# EAGLE board 13346-Serial Controlled Motor Driver-panel_v20 (EAGLE 7.5.0), part 1 of 11
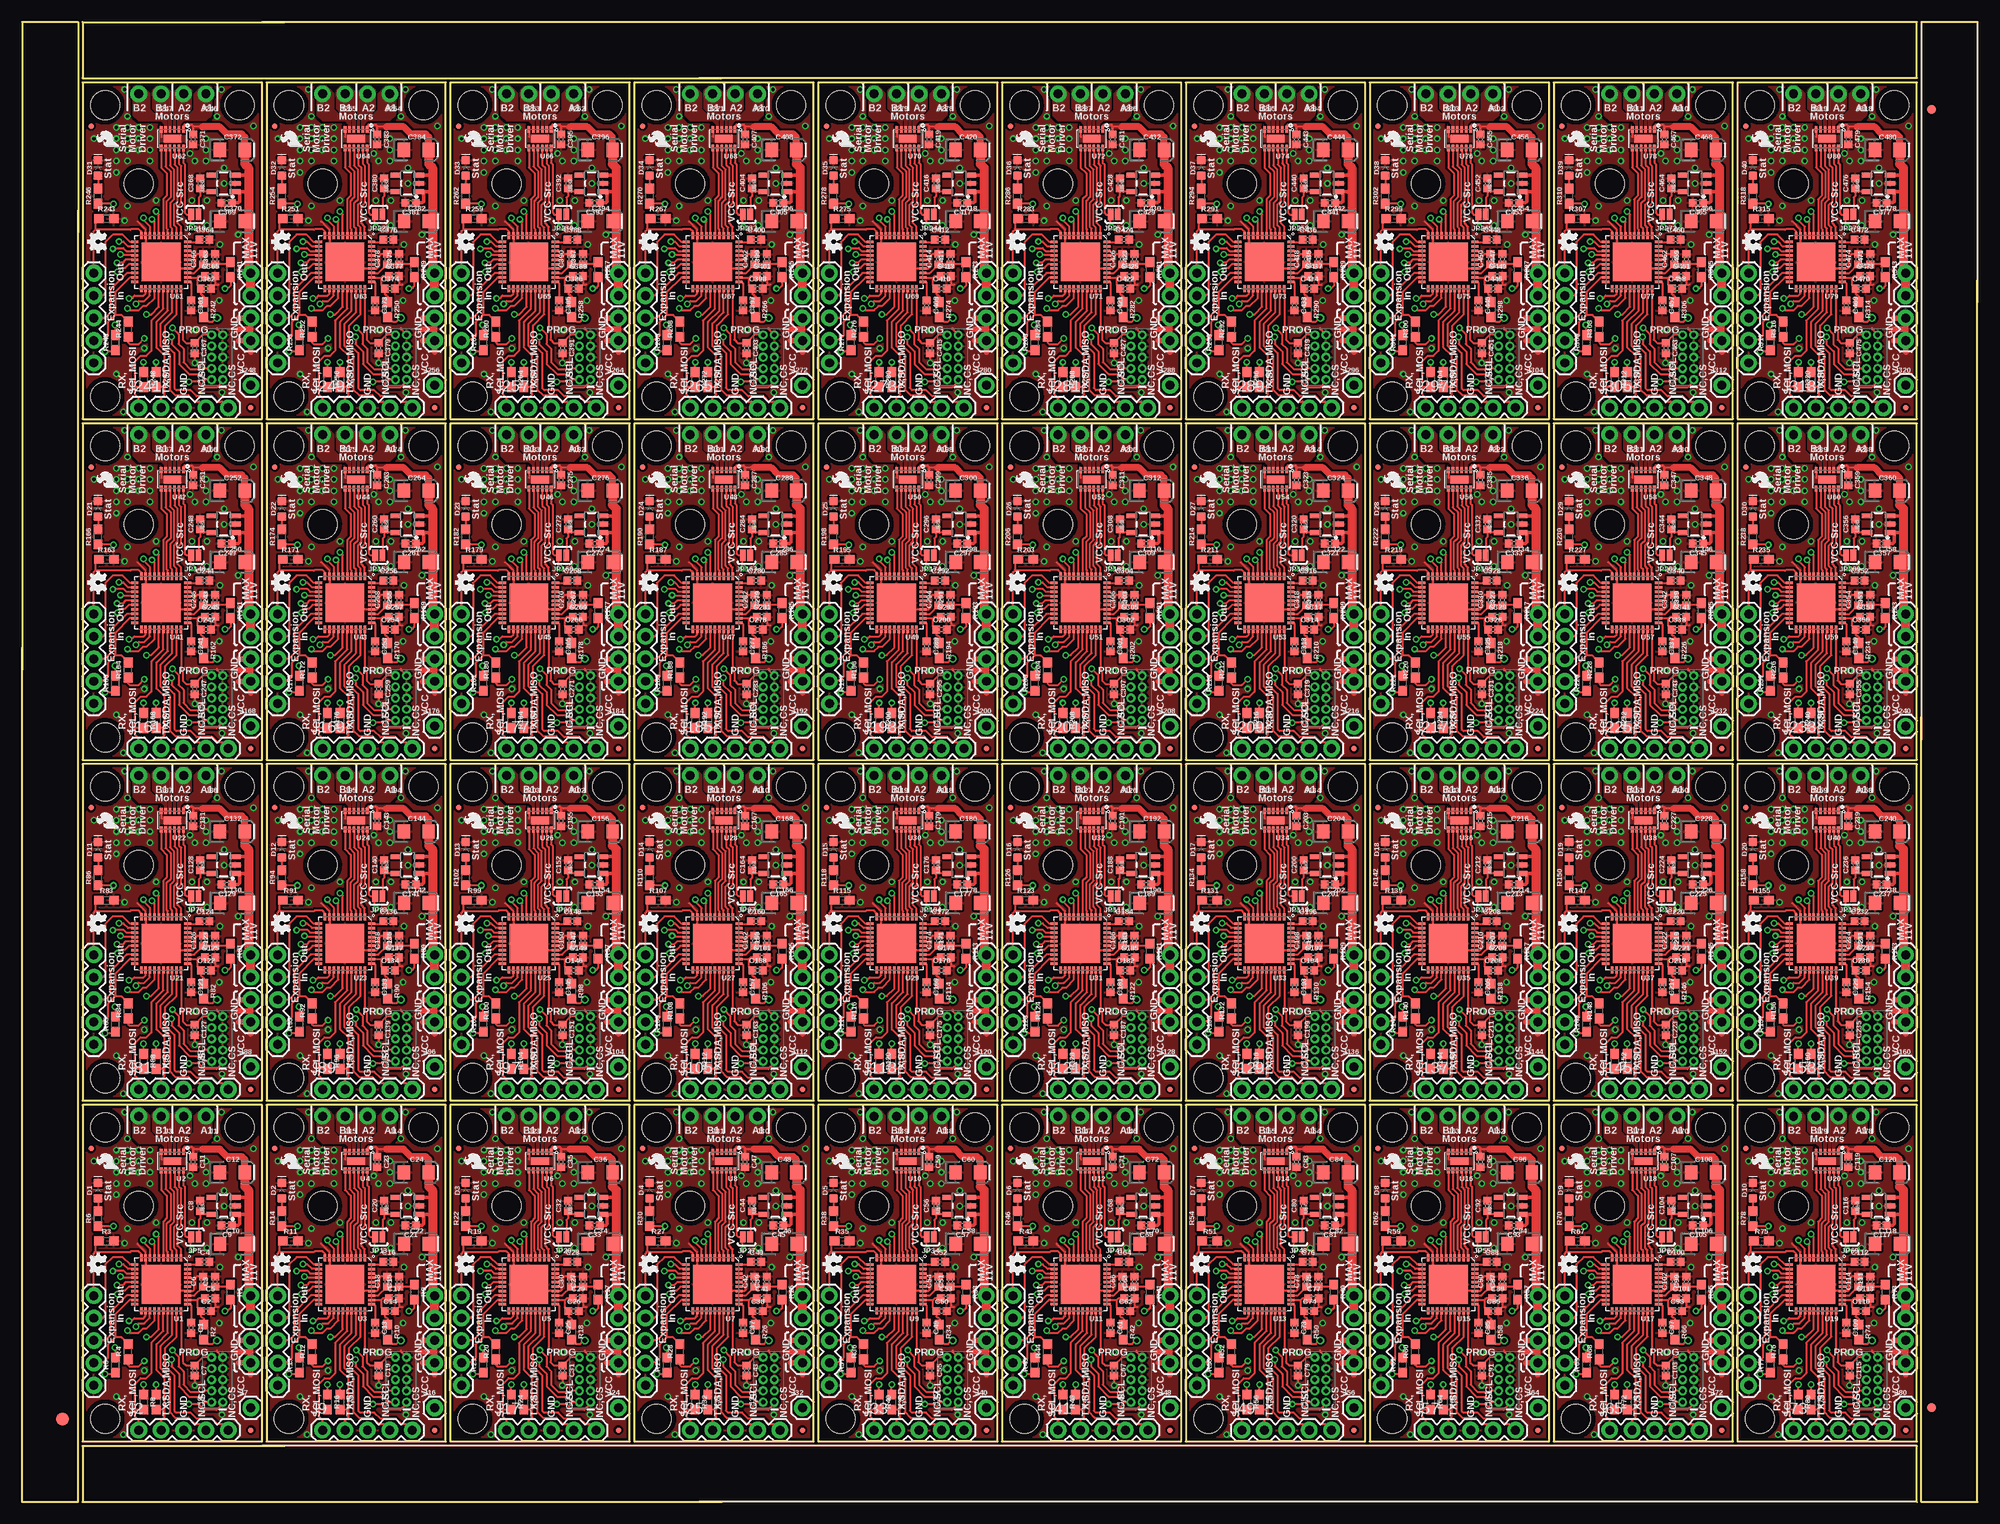
[diagram p0: board, top side]
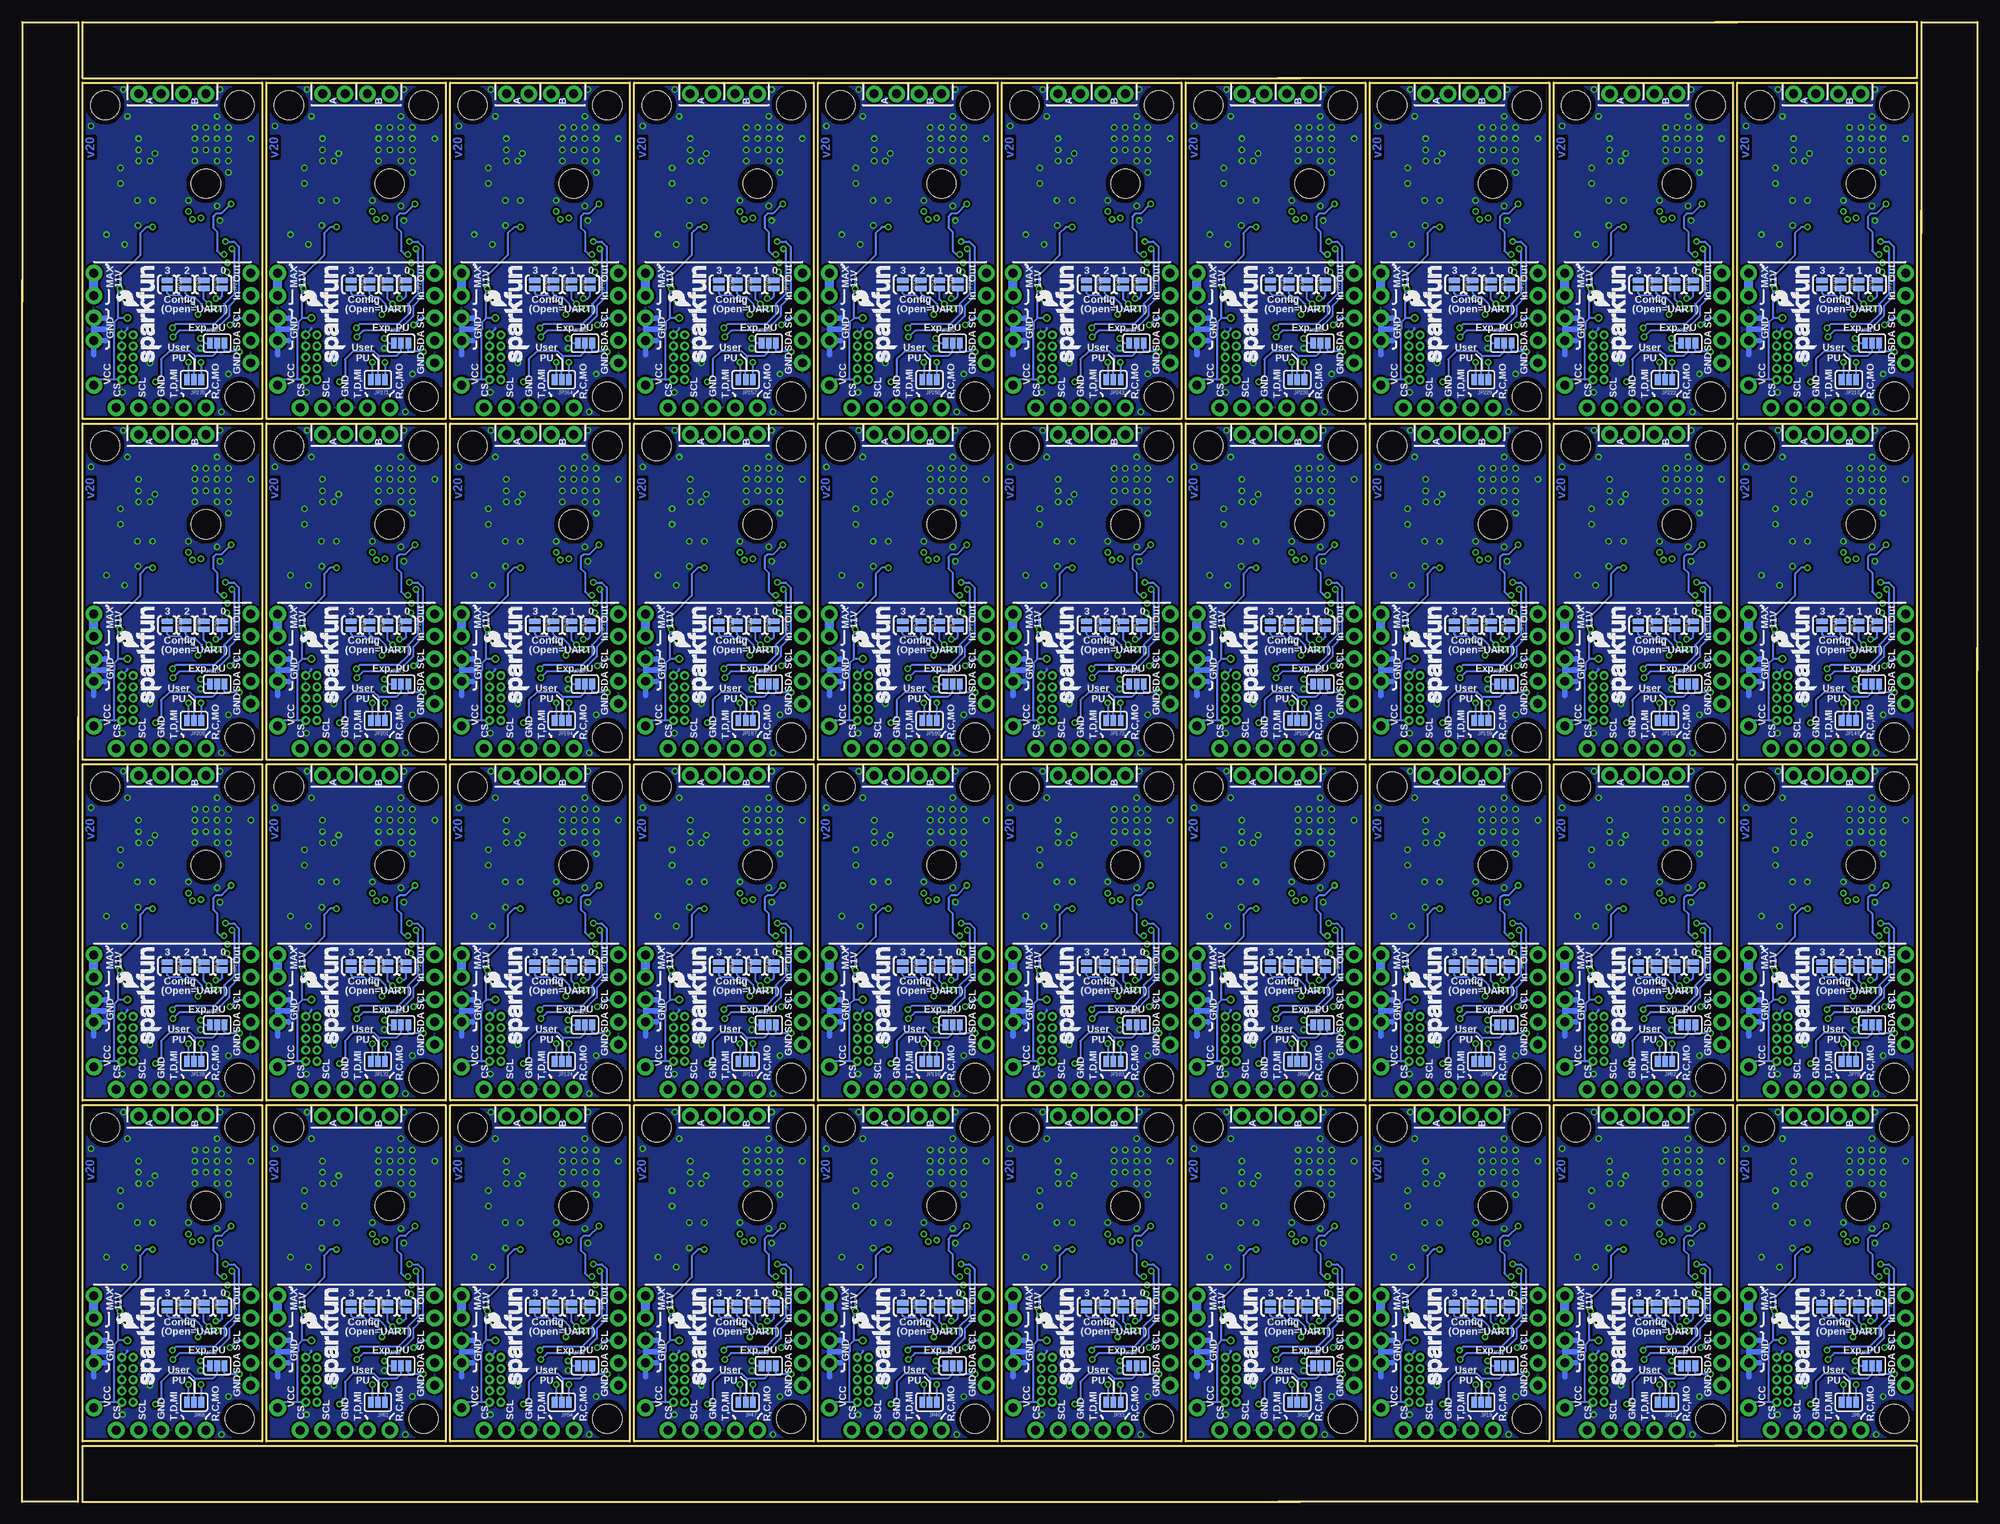
[diagram p1: board, bottom side, seen from below]

Size 221.49 x 167.64 mm. Coordinates in mm from the lower left corner, seen from the top.
Outline: 184 segments
Copper layers (1*16): Top 0.035mm / dielectric 1.5mm / Bottom 0.035mm
Design rules "SparkFun-2-layer-TIGHT": minimum track width 7mil, minimum drill 15mil, track to track 7mil, track to pad 7mil, pad to pad 7mil, via to via 7mil, smd to smd 7mil, copper to edge 7mil, drill to drill 7mil, minimum pad ring 7mil, minimum via ring 7mil, stop-mask expansion 4mil, vias tented up to drill 25mil, thermal gap 10mil

## Footprints (pad centres in the part's own frame; a part is rotated, then mirrored left to right if it is on the bottom)
0402 = smd 0.85 x 0.9: 1 -0.58,0; 2 0.58,0
EIA3216 = smd 1.4 x 1.6: + 1.4,0; - -1.4,0
LED-0603 = smd 1 x 1: A -0.877,0; C 0.877,0
FIDUCIAL-1.5X3 = smd 1.5 x 1.5: 1 0,0
FIDUCIAL-1X2 = smd 1 x 1: 1 0,0
MICRO-FIDUCIAL = smd 0.635 x 0.635: 1 0,0
STAND-OFF = hole 3.302: 0,0
1X02_NO_SILK = drill 1.016 pad 1.88: 1 0,0; 2 2.54,0
1X05 = drill 1.016 pad 1.88: 1 0,0; 2 2.54,0; 3 5.08,0; 4 7.62,0; 5 10.16,0
1X02@1 = drill 1.016 pad 1.88: 1 0,0; 2 2.54,0
1X01 = drill 1.016 pad 1.88: 1 0,0
2X5-PTH-1.27MM = drill 0.508 pad 1: 1 -2.54,-0.635; 2 -2.54,0.635; 3 -1.27,-0.635; 4 -1.27,0.635; 5 0,-0.635; 6 0,0.635; 7 1.27,-0.635; 8 1.27,0.635; 9 2.54,-0.635; 10 2.54,0.635
PAD-JUMPER-2-NO_YES_SILK = smd 0.635 x 1.27: 1 -0.45,0; 2 0.45,0
PAD-JUMPER-2-NC_BY_PASTE_YES_SILK = smd 0.635 x 1.27: 1 -0.401,0; 2 0.413,0
PAD-JUMPER-3-NO_YES_SILK = smd 0.635 x 1.27: 1 -0.813,0; 2 0,0; 3 0.813,0
0603 = smd 1.1 x 1: 1 -0.85,0; 2 0.85,0
QFN-40 = smd 0.285 x 0.8: 1 -2.25,-3; 2 -1.75,-3; 3 -1.25,-3; 4 -0.75,-3; 5 -0.25,-3; 6 0.25,-3; 7 0.75,-3; 8 1.25,-3; 9 1.75,-3; 10 2.25,-3; 21 2.25,3; 22 1.75,3; 23 1.25,3; 24 0.75,3; 25 0.25,3; 26 -0.25,3; 27 -0.75,3; 28 -1.25,3; 29 -1.75,3; 30 -2.25,3 | smd 0.8 x 0.285: 11 3,-2.25; 12 3,-1.75; 13 3,-1.25; 14 3,-0.75; 15 3,-0.25; 16 3,0.25; 17 3,0.75; 18 3,1.25; 19 3,1.75; 20 3,2.25; 31 -3,2.25; 32 -3,1.75; 33 -3,1.25; 34 -3,0.75; 35 -3,0.25; 36 -3,-0.25; 37 -3,-0.75; 38 -3,-1.25; 39 -3,-1.75; 40 -3,-2.25 | smd 4.4 x 4.4: EP 0,0
WSON-12 = smd 0.3 x 0.7: 1 -1.25,-1.05; 2 -0.75,-1.05; 3 -0.25,-1.05; 4 0.25,-1.05; 5 0.75,-1.05; 6 1.25,-1.05; 7 1.25,1.05; 8 0.75,1.05; 9 0.25,1.05; 10 -0.25,1.05; 11 -0.75,1.05; 12 -1.25,1.05 | smd 2 x 0.9: PAD 0,0
SOT-23-5-VREG = smd 0.55 x 1.2: 1 -0.95,-1.3; 2 0,-1.3; 3 0.95,-1.3; 4 0.95,1.3; 5 -0.95,1.3

## Placement (x,y rotation side)
C1  1.0uF  [0402]  19.16,19.72 270 top
C2  1.0uF  [0402]  20.83,21.62 0 top
C3  1.0uF  [0402]  21.88,24.96 90 top
C4  1.0uF  [0402]  20.67,27.18 0 top
C5  0.1uF  [0402]  21.3,23.05 0 top
C6  0.1uF  [0402]  20.51,24.96 90 top
C7  0.1uF  [0402]  19.56,14.87 270 top
C8  1.0uF  [0402]  20.2,33.53 90 top
C9  1.0uF  [0402]  23.19,31.33 180 top
C10  10uF  [EIA3216]  23.84,29.24 0 top
C11  0.1uF  [0402]  19.4,38.53 270 top
C12  10uF  [EIA3216]  23.83,37.33 0 top
C13  1.0uF  [0402]  39.99,19.72 270 top
C14  1.0uF  [0402]  41.66,21.62 0 top
C15  1.0uF  [0402]  42.7,24.96 90 top
C16  1.0uF  [0402]  41.5,27.18 0 top
C17  0.1uF  [0402]  42.13,23.05 0 top
C18  0.1uF  [0402]  41.34,24.96 90 top
C19  0.1uF  [0402]  40.39,14.87 270 top
C20  1.0uF  [0402]  41.03,33.53 90 top
C21  1.0uF  [0402]  44.01,31.33 180 top
C22  10uF  [EIA3216]  44.67,29.24 0 top
C23  0.1uF  [0402]  40.23,38.53 270 top
C24  10uF  [EIA3216]  44.66,37.33 0 top
C25  1.0uF  [0402]  60.82,19.72 270 top
C26  1.0uF  [0402]  62.48,21.62 0 top
C27  1.0uF  [0402]  63.53,24.96 90 top
C28  1.0uF  [0402]  62.33,27.18 0 top
C29  0.1uF  [0402]  62.96,23.05 0 top
C30  0.1uF  [0402]  62.17,24.96 90 top
C31  0.1uF  [0402]  61.21,14.87 270 top
C32  1.0uF  [0402]  61.86,33.53 90 top
C33  1.0uF  [0402]  64.84,31.33 180 top
C34  10uF  [EIA3216]  65.5,29.24 0 top
C35  0.1uF  [0402]  61.06,38.53 270 top
C36  10uF  [EIA3216]  65.48,37.33 0 top
C37  1.0uF  [0402]  81.65,19.72 270 top
C38  1.0uF  [0402]  83.31,21.62 0 top
C39  1.0uF  [0402]  84.36,24.96 90 top
C40  1.0uF  [0402]  83.15,27.18 0 top
C41  0.1uF  [0402]  83.79,23.05 0 top
C42  0.1uF  [0402]  82.99,24.96 90 top
C43  0.1uF  [0402]  82.04,14.87 270 top
C44  1.0uF  [0402]  82.68,33.53 90 top
C45  1.0uF  [0402]  85.67,31.33 180 top
C46  10uF  [EIA3216]  86.33,29.24 0 top
C47  0.1uF  [0402]  81.88,38.53 270 top
C48  10uF  [EIA3216]  86.31,37.33 0 top
C49  1.0uF  [0402]  102.47,19.72 270 top
C50  1.0uF  [0402]  104.14,21.62 0 top
C51  1.0uF  [0402]  105.19,24.96 90 top
C52  1.0uF  [0402]  103.98,27.18 0 top
C53  0.1uF  [0402]  104.62,23.05 0 top
C54  0.1uF  [0402]  103.82,24.96 90 top
C55  0.1uF  [0402]  102.87,14.87 270 top
C56  1.0uF  [0402]  103.51,33.53 90 top
C57  1.0uF  [0402]  106.5,31.33 180 top
C58  10uF  [EIA3216]  107.16,29.24 0 top
C59  0.1uF  [0402]  102.71,38.53 270 top
C60  10uF  [EIA3216]  107.14,37.33 0 top
C61  1.0uF  [0402]  123.3,19.72 270 top
C62  1.0uF  [0402]  124.97,21.62 0 top
C63  1.0uF  [0402]  126.02,24.96 90 top
C64  1.0uF  [0402]  124.81,27.18 0 top
C65  0.1uF  [0402]  125.44,23.05 0 top
C66  0.1uF  [0402]  124.65,24.96 90 top
C67  0.1uF  [0402]  123.7,14.87 270 top
C68  1.0uF  [0402]  124.34,33.53 90 top
C69  1.0uF  [0402]  127.33,31.33 180 top
C70  10uF  [EIA3216]  127.98,29.24 0 top
C71  0.1uF  [0402]  123.54,38.53 270 top
C72  10uF  [EIA3216]  127.97,37.33 0 top
C73  1.0uF  [0402]  144.13,19.72 270 top
C74  1.0uF  [0402]  145.8,21.62 0 top
C75  1.0uF  [0402]  146.84,24.96 90 top
C76  1.0uF  [0402]  145.64,27.18 0 top
C77  0.1uF  [0402]  146.27,23.05 0 top
C78  0.1uF  [0402]  145.48,24.96 90 top
C79  0.1uF  [0402]  144.53,14.87 270 top
C80  1.0uF  [0402]  145.17,33.53 90 top
C81  1.0uF  [0402]  148.15,31.33 180 top
C82  10uF  [EIA3216]  148.81,29.24 0 top
C83  0.1uF  [0402]  144.37,38.53 270 top
C84  10uF  [EIA3216]  148.8,37.33 0 top
C85  1.0uF  [0402]  164.96,19.72 270 top
C86  1.0uF  [0402]  166.62,21.62 0 top
C87  1.0uF  [0402]  167.67,24.96 90 top
C88  1.0uF  [0402]  166.47,27.18 0 top
C89  0.1uF  [0402]  167.1,23.05 0 top
C90  0.1uF  [0402]  166.31,24.96 90 top
C91  0.1uF  [0402]  165.35,14.87 270 top
C92  1.0uF  [0402]  166,33.53 90 top
C93  1.0uF  [0402]  168.98,31.33 180 top
C94  10uF  [EIA3216]  169.64,29.24 0 top
C95  0.1uF  [0402]  165.2,38.53 270 top
C96  10uF  [EIA3216]  169.62,37.33 0 top
C97  1.0uF  [0402]  185.79,19.72 270 top
C98  1.0uF  [0402]  187.45,21.62 0 top
C99  1.0uF  [0402]  188.5,24.96 90 top
C100  1.0uF  [0402]  187.29,27.18 0 top
C101  0.1uF  [0402]  187.93,23.05 0 top
C102  0.1uF  [0402]  187.13,24.96 90 top
C103  0.1uF  [0402]  186.18,14.87 270 top
C104  1.0uF  [0402]  186.82,33.53 90 top
C105  1.0uF  [0402]  189.81,31.33 180 top
C106  10uF  [EIA3216]  190.47,29.24 0 top
C107  0.1uF  [0402]  186.02,38.53 270 top
C108  10uF  [EIA3216]  190.45,37.33 0 top
C109  1.0uF  [0402]  206.61,19.72 270 top
C110  1.0uF  [0402]  208.28,21.62 0 top
C111  1.0uF  [0402]  209.33,24.96 90 top
C112  1.0uF  [0402]  208.12,27.18 0 top
C113  0.1uF  [0402]  208.76,23.05 0 top
C114  0.1uF  [0402]  207.96,24.96 90 top
C115  0.1uF  [0402]  207.01,14.87 270 top
C116  1.0uF  [0402]  207.65,33.53 90 top
C117  1.0uF  [0402]  210.64,31.33 180 top
C118  10uF  [EIA3216]  211.3,29.24 0 top
C119  0.1uF  [0402]  206.85,38.53 270 top
C120  10uF  [EIA3216]  211.28,37.33 0 top
C121  1.0uF  [0402]  19.16,58.32 270 top
C122  1.0uF  [0402]  20.83,60.23 0 top
C123  1.0uF  [0402]  21.88,63.56 90 top
C124  1.0uF  [0402]  20.67,65.79 0 top
C125  0.1uF  [0402]  21.3,61.66 0 top
C126  0.1uF  [0402]  20.51,63.56 90 top
C127  0.1uF  [0402]  19.56,53.48 270 top
C128  1.0uF  [0402]  20.2,72.14 90 top
C129  1.0uF  [0402]  23.19,69.94 180 top
C130  10uF  [EIA3216]  23.84,67.85 0 top
C131  0.1uF  [0402]  19.4,77.14 270 top
C132  10uF  [EIA3216]  23.83,75.94 0 top
C133  1.0uF  [0402]  39.99,58.32 270 top
C134  1.0uF  [0402]  41.66,60.23 0 top
C135  1.0uF  [0402]  42.7,63.56 90 top
C136  1.0uF  [0402]  41.5,65.79 0 top
C137  0.1uF  [0402]  42.13,61.66 0 top
C138  0.1uF  [0402]  41.34,63.56 90 top
C139  0.1uF  [0402]  40.39,53.48 270 top
C140  1.0uF  [0402]  41.03,72.14 90 top
C141  1.0uF  [0402]  44.01,69.94 180 top
C142  10uF  [EIA3216]  44.67,67.85 0 top
C143  0.1uF  [0402]  40.23,77.14 270 top
C144  10uF  [EIA3216]  44.66,75.94 0 top
C145  1.0uF  [0402]  60.82,58.32 270 top
C146  1.0uF  [0402]  62.48,60.23 0 top
C147  1.0uF  [0402]  63.53,63.56 90 top
C148  1.0uF  [0402]  62.33,65.79 0 top
C149  0.1uF  [0402]  62.96,61.66 0 top
C150  0.1uF  [0402]  62.17,63.56 90 top
C151  0.1uF  [0402]  61.21,53.48 270 top
C152  1.0uF  [0402]  61.86,72.14 90 top
C153  1.0uF  [0402]  64.84,69.94 180 top
C154  10uF  [EIA3216]  65.5,67.85 0 top
C155  0.1uF  [0402]  61.06,77.14 270 top
C156  10uF  [EIA3216]  65.48,75.94 0 top
C157  1.0uF  [0402]  81.65,58.32 270 top
C158  1.0uF  [0402]  83.31,60.23 0 top
C159  1.0uF  [0402]  84.36,63.56 90 top
C160  1.0uF  [0402]  83.15,65.79 0 top
C161  0.1uF  [0402]  83.79,61.66 0 top
C162  0.1uF  [0402]  82.99,63.56 90 top
C163  0.1uF  [0402]  82.04,53.48 270 top
C164  1.0uF  [0402]  82.68,72.14 90 top
C165  1.0uF  [0402]  85.67,69.94 180 top
C166  10uF  [EIA3216]  86.33,67.85 0 top
C167  0.1uF  [0402]  81.88,77.14 270 top
C168  10uF  [EIA3216]  86.31,75.94 0 top
C169  1.0uF  [0402]  102.47,58.32 270 top
C170  1.0uF  [0402]  104.14,60.23 0 top
C171  1.0uF  [0402]  105.19,63.56 90 top
C172  1.0uF  [0402]  103.98,65.79 0 top
C173  0.1uF  [0402]  104.62,61.66 0 top
C174  0.1uF  [0402]  103.82,63.56 90 top
C175  0.1uF  [0402]  102.87,53.48 270 top
C176  1.0uF  [0402]  103.51,72.14 90 top
C177  1.0uF  [0402]  106.5,69.94 180 top
C178  10uF  [EIA3216]  107.16,67.85 0 top
C179  0.1uF  [0402]  102.71,77.14 270 top
C180  10uF  [EIA3216]  107.14,75.94 0 top
C181  1.0uF  [0402]  123.3,58.32 270 top
C182  1.0uF  [0402]  124.97,60.23 0 top
C183  1.0uF  [0402]  126.02,63.56 90 top
C184  1.0uF  [0402]  124.81,65.79 0 top
C185  0.1uF  [0402]  125.44,61.66 0 top
C186  0.1uF  [0402]  124.65,63.56 90 top
C187  0.1uF  [0402]  123.7,53.48 270 top
C188  1.0uF  [0402]  124.34,72.14 90 top
C189  1.0uF  [0402]  127.33,69.94 180 top
C190  10uF  [EIA3216]  127.98,67.85 0 top
C191  0.1uF  [0402]  123.54,77.14 270 top
C192  10uF  [EIA3216]  127.97,75.94 0 top
C193  1.0uF  [0402]  144.13,58.32 270 top
C194  1.0uF  [0402]  145.8,60.23 0 top
C195  1.0uF  [0402]  146.84,63.56 90 top
C196  1.0uF  [0402]  145.64,65.79 0 top
C197  0.1uF  [0402]  146.27,61.66 0 top
C198  0.1uF  [0402]  145.48,63.56 90 top
C199  0.1uF  [0402]  144.53,53.48 270 top
C200  1.0uF  [0402]  145.17,72.14 90 top
C201  1.0uF  [0402]  148.15,69.94 180 top
C202  10uF  [EIA3216]  148.81,67.85 0 top
C203  0.1uF  [0402]  144.37,77.14 270 top
C204  10uF  [EIA3216]  148.8,75.94 0 top
C205  1.0uF  [0402]  164.96,58.32 270 top
C206  1.0uF  [0402]  166.62,60.23 0 top
C207  1.0uF  [0402]  167.67,63.56 90 top
C208  1.0uF  [0402]  166.47,65.79 0 top
C209  0.1uF  [0402]  167.1,61.66 0 top
C210  0.1uF  [0402]  166.31,63.56 90 top
C211  0.1uF  [0402]  165.35,53.48 270 top
C212  1.0uF  [0402]  166,72.14 90 top
C213  1.0uF  [0402]  168.98,69.94 180 top
C214  10uF  [EIA3216]  169.64,67.85 0 top
C215  0.1uF  [0402]  165.2,77.14 270 top
C216  10uF  [EIA3216]  169.62,75.94 0 top
C217  1.0uF  [0402]  185.79,58.32 270 top
C218  1.0uF  [0402]  187.45,60.23 0 top
C219  1.0uF  [0402]  188.5,63.56 90 top
C220  1.0uF  [0402]  187.29,65.79 0 top
C221  0.1uF  [0402]  187.93,61.66 0 top
C222  0.1uF  [0402]  187.13,63.56 90 top
C223  0.1uF  [0402]  186.18,53.48 270 top
C224  1.0uF  [0402]  186.82,72.14 90 top
C225  1.0uF  [0402]  189.81,69.94 180 top
C226  10uF  [EIA3216]  190.47,67.85 0 top
C227  0.1uF  [0402]  186.02,77.14 270 top
C228  10uF  [EIA3216]  190.45,75.94 0 top
C229  1.0uF  [0402]  206.61,58.32 270 top
C230  1.0uF  [0402]  208.28,60.23 0 top
C231  1.0uF  [0402]  209.33,63.56 90 top
C232  1.0uF  [0402]  208.12,65.79 0 top
C233  0.1uF  [0402]  208.76,61.66 0 top
C234  0.1uF  [0402]  207.96,63.56 90 top
C235  0.1uF  [0402]  207.01,53.48 270 top
C236  1.0uF  [0402]  207.65,72.14 90 top
C237  1.0uF  [0402]  210.64,69.94 180 top
C238  10uF  [EIA3216]  211.3,67.85 0 top
C239  0.1uF  [0402]  206.85,77.14 270 top
C240  10uF  [EIA3216]  211.28,75.94 0 top
C241  1.0uF  [0402]  19.16,96.93 270 top
C242  1.0uF  [0402]  20.83,98.84 0 top
C243  1.0uF  [0402]  21.88,102.17 90 top
C244  1.0uF  [0402]  20.67,104.39 0 top
C245  0.1uF  [0402]  21.3,100.27 0 top
C246  0.1uF  [0402]  20.51,102.17 90 top
C247  0.1uF  [0402]  19.56,92.09 270 top
C248  1.0uF  [0402]  20.2,110.74 90 top
C249  1.0uF  [0402]  23.19,108.55 180 top
C250  10uF  [EIA3216]  23.84,106.46 0 top
C251  0.1uF  [0402]  19.4,115.74 270 top
C252  10uF  [EIA3216]  23.83,114.55 0 top
C253  1.0uF  [0402]  39.99,96.93 270 top
C254  1.0uF  [0402]  41.66,98.84 0 top
C255  1.0uF  [0402]  42.7,102.17 90 top
C256  1.0uF  [0402]  41.5,104.39 0 top
C257  0.1uF  [0402]  42.13,100.27 0 top
C258  0.1uF  [0402]  41.34,102.17 90 top
C259  0.1uF  [0402]  40.39,92.09 270 top
C260  1.0uF  [0402]  41.03,110.74 90 top
C261  1.0uF  [0402]  44.01,108.55 180 top
C262  10uF  [EIA3216]  44.67,106.46 0 top
C263  0.1uF  [0402]  40.23,115.74 270 top
C264  10uF  [EIA3216]  44.66,114.55 0 top
C265  1.0uF  [0402]  60.82,96.93 270 top
C266  1.0uF  [0402]  62.48,98.84 0 top
C267  1.0uF  [0402]  63.53,102.17 90 top
C268  1.0uF  [0402]  62.33,104.39 0 top
C269  0.1uF  [0402]  62.96,100.27 0 top
C270  0.1uF  [0402]  62.17,102.17 90 top
C271  0.1uF  [0402]  61.21,92.09 270 top
C272  1.0uF  [0402]  61.86,110.74 90 top
C273  1.0uF  [0402]  64.84,108.55 180 top
C274  10uF  [EIA3216]  65.5,106.46 0 top
C275  0.1uF  [0402]  61.06,115.74 270 top
C276  10uF  [EIA3216]  65.48,114.55 0 top
C277  1.0uF  [0402]  81.65,96.93 270 top
C278  1.0uF  [0402]  83.31,98.84 0 top
C279  1.0uF  [0402]  84.36,102.17 90 top
C280  1.0uF  [0402]  83.15,104.39 0 top
C281  0.1uF  [0402]  83.79,100.27 0 top
C282  0.1uF  [0402]  82.99,102.17 90 top
C283  0.1uF  [0402]  82.04,92.09 270 top
C284  1.0uF  [0402]  82.68,110.74 90 top
C285  1.0uF  [0402]  85.67,108.55 180 top
C286  10uF  [EIA3216]  86.33,106.46 0 top
C287  0.1uF  [0402]  81.88,115.74 270 top
C288  10uF  [EIA3216]  86.31,114.55 0 top
C289  1.0uF  [0402]  102.47,96.93 270 top
C290  1.0uF  [0402]  104.14,98.84 0 top
C291  1.0uF  [0402]  105.19,102.17 90 top
C292  1.0uF  [0402]  103.98,104.39 0 top
C293  0.1uF  [0402]  104.62,100.27 0 top
C294  0.1uF  [0402]  103.82,102.17 90 top
C295  0.1uF  [0402]  102.87,92.09 270 top
C296  1.0uF  [0402]  103.51,110.74 90 top
C297  1.0uF  [0402]  106.5,108.55 180 top
C298  10uF  [EIA3216]  107.16,106.46 0 top
C299  0.1uF  [0402]  102.71,115.74 270 top
C300  10uF  [EIA3216]  107.14,114.55 0 top
C301  1.0uF  [0402]  123.3,96.93 270 top
C302  1.0uF  [0402]  124.97,98.84 0 top
C303  1.0uF  [0402]  126.02,102.17 90 top
C304  1.0uF  [0402]  124.81,104.39 0 top
C305  0.1uF  [0402]  125.44,100.27 0 top
C306  0.1uF  [0402]  124.65,102.17 90 top
C307  0.1uF  [0402]  123.7,92.09 270 top
C308  1.0uF  [0402]  124.34,110.74 90 top
C309  1.0uF  [0402]  127.33,108.55 180 top
C310  10uF  [EIA3216]  127.98,106.46 0 top
C311  0.1uF  [0402]  123.54,115.74 270 top
C312  10uF  [EIA3216]  127.97,114.55 0 top
C313  1.0uF  [0402]  144.13,96.93 270 top
C314  1.0uF  [0402]  145.8,98.84 0 top
C315  1.0uF  [0402]  146.84,102.17 90 top
C316  1.0uF  [0402]  145.64,104.39 0 top
C317  0.1uF  [0402]  146.27,100.27 0 top
C318  0.1uF  [0402]  145.48,102.17 90 top
C319  0.1uF  [0402]  144.53,92.09 270 top
C320  1.0uF  [0402]  145.17,110.74 90 top
C321  1.0uF  [0402]  148.15,108.55 180 top
C322  10uF  [EIA3216]  148.81,106.46 0 top
C323  0.1uF  [0402]  144.37,115.74 270 top
C324  10uF  [EIA3216]  148.8,114.55 0 top
C325  1.0uF  [0402]  164.96,96.93 270 top
C326  1.0uF  [0402]  166.62,98.84 0 top
C327  1.0uF  [0402]  167.67,102.17 90 top
C328  1.0uF  [0402]  166.47,104.39 0 top
C329  0.1uF  [0402]  167.1,100.27 0 top
C330  0.1uF  [0402]  166.31,102.17 90 top
C331  0.1uF  [0402]  165.35,92.09 270 top
C332  1.0uF  [0402]  166,110.74 90 top
C333  1.0uF  [0402]  168.98,108.55 180 top
C334  10uF  [EIA3216]  169.64,106.46 0 top
C335  0.1uF  [0402]  165.2,115.74 270 top
C336  10uF  [EIA3216]  169.62,114.55 0 top
C337  1.0uF  [0402]  185.79,96.93 270 top
C338  1.0uF  [0402]  187.45,98.84 0 top
C339  1.0uF  [0402]  188.5,102.17 90 top
C340  1.0uF  [0402]  187.29,104.39 0 top
C341  0.1uF  [0402]  187.93,100.27 0 top
C342  0.1uF  [0402]  187.13,102.17 90 top
C343  0.1uF  [0402]  186.18,92.09 270 top
C344  1.0uF  [0402]  186.82,110.74 90 top
C345  1.0uF  [0402]  189.81,108.55 180 top
C346  10uF  [EIA3216]  190.47,106.46 0 top
C347  0.1uF  [0402]  186.02,115.74 270 top
C348  10uF  [EIA3216]  190.45,114.55 0 top
C349  1.0uF  [0402]  206.61,96.93 270 top
C350  1.0uF  [0402]  208.28,98.84 0 top
C351  1.0uF  [0402]  209.33,102.17 90 top
C352  1.0uF  [0402]  208.12,104.39 0 top
C353  0.1uF  [0402]  208.76,100.27 0 top
C354  0.1uF  [0402]  207.96,102.17 90 top
C355  0.1uF  [0402]  207.01,92.09 270 top
C356  1.0uF  [0402]  207.65,110.74 90 top
C357  1.0uF  [0402]  210.64,108.55 180 top
C358  10uF  [EIA3216]  211.3,106.46 0 top
C359  0.1uF  [0402]  206.85,115.74 270 top
C360  10uF  [EIA3216]  211.28,114.55 0 top
C361  1.0uF  [0402]  19.16,135.54 270 top
C362  1.0uF  [0402]  20.83,137.45 0 top
C363  1.0uF  [0402]  21.88,140.78 90 top
C364  1.0uF  [0402]  20.67,143 0 top
C365  0.1uF  [0402]  21.3,138.87 0 top
C366  0.1uF  [0402]  20.51,140.78 90 top
C367  0.1uF  [0402]  19.56,130.7 270 top
C368  1.0uF  [0402]  20.2,149.35 90 top
C369  1.0uF  [0402]  23.19,147.15 180 top
C370  10uF  [EIA3216]  23.84,145.07 0 top
C371  0.1uF  [0402]  19.4,154.35 270 top
C372  10uF  [EIA3216]  23.83,153.15 0 top
C373  1.0uF  [0402]  39.99,135.54 270 top
C374  1.0uF  [0402]  41.66,137.45 0 top
C375  1.0uF  [0402]  42.7,140.78 90 top
C376  1.0uF  [0402]  41.5,143 0 top
C377  0.1uF  [0402]  42.13,138.87 0 top
C378  0.1uF  [0402]  41.34,140.78 90 top
C379  0.1uF  [0402]  40.39,130.7 270 top
C380  1.0uF  [0402]  41.03,149.35 90 top
C381  1.0uF  [0402]  44.01,147.15 180 top
C382  10uF  [EIA3216]  44.67,145.07 0 top
C383  0.1uF  [0402]  40.23,154.35 270 top
C384  10uF  [EIA3216]  44.66,153.15 0 top
C385  1.0uF  [0402]  60.82,135.54 270 top
C386  1.0uF  [0402]  62.48,137.45 0 top
C387  1.0uF  [0402]  63.53,140.78 90 top
C388  1.0uF  [0402]  62.33,143 0 top
C389  0.1uF  [0402]  62.96,138.87 0 top
C390  0.1uF  [0402]  62.17,140.78 90 top
C391  0.1uF  [0402]  61.21,130.7 270 top
C392  1.0uF  [0402]  61.86,149.35 90 top
C393  1.0uF  [0402]  64.84,147.15 180 top
C394  10uF  [EIA3216]  65.5,145.07 0 top
C395  0.1uF  [0402]  61.06,154.35 270 top
C396  10uF  [EIA3216]  65.48,153.15 0 top
C397  1.0uF  [0402]  81.65,135.54 270 top
C398  1.0uF  [0402]  83.31,137.45 0 top
C399  1.0uF  [0402]  84.36,140.78 90 top
C400  1.0uF  [0402]  83.15,143 0 top
C401  0.1uF  [0402]  83.79,138.87 0 top
C402  0.1uF  [0402]  82.99,140.78 90 top
C403  0.1uF  [0402]  82.04,130.7 270 top
C404  1.0uF  [0402]  82.68,149.35 90 top
C405  1.0uF  [0402]  85.67,147.15 180 top
C406  10uF  [EIA3216]  86.33,145.07 0 top
C407  0.1uF  [0402]  81.88,154.35 270 top
C408  10uF  [EIA3216]  86.31,153.15 0 top
C409  1.0uF  [0402]  102.47,135.54 270 top
C410  1.0uF  [0402]  104.14,137.45 0 top
C411  1.0uF  [0402]  105.19,140.78 90 top
C412  1.0uF  [0402]  103.98,143 0 top
C413  0.1uF  [0402]  104.62,138.87 0 top
C414  0.1uF  [0402]  103.82,140.78 90 top
C415  0.1uF  [0402]  102.87,130.7 270 top
C416  1.0uF  [0402]  103.51,149.35 90 top
C417  1.0uF  [0402]  106.5,147.15 180 top
C418  10uF  [EIA3216]  107.16,145.07 0 top
C419  0.1uF  [0402]  102.71,154.35 270 top
C420  10uF  [EIA3216]  107.14,153.15 0 top
C421  1.0uF  [0402]  123.3,135.54 270 top
C422  1.0uF  [0402]  124.97,137.45 0 top
C423  1.0uF  [0402]  126.02,140.78 90 top
C424  1.0uF  [0402]  124.81,143 0 top
C425  0.1uF  [0402]  125.44,138.87 0 top
C426  0.1uF  [0402]  124.65,140.78 90 top
C427  0.1uF  [0402]  123.7,130.7 270 top
C428  1.0uF  [0402]  124.34,149.35 90 top
C429  1.0uF  [0402]  127.33,147.15 180 top
C430  10uF  [EIA3216]  127.98,145.07 0 top
C431  0.1uF  [0402]  123.54,154.35 270 top
C432  10uF  [EIA3216]  127.97,153.15 0 top
C433  1.0uF  [0402]  144.13,135.54 270 top
C434  1.0uF  [0402]  145.8,137.45 0 top
C435  1.0uF  [0402]  146.84,140.78 90 top
C436  1.0uF  [0402]  145.64,143 0 top
C437  0.1uF  [0402]  146.27,138.87 0 top
C438  0.1uF  [0402]  145.48,140.78 90 top
C439  0.1uF  [0402]  144.53,130.7 270 top
C440  1.0uF  [0402]  145.17,149.35 90 top
C441  1.0uF  [0402]  148.15,147.15 180 top
C442  10uF  [EIA3216]  148.81,145.07 0 top
C443  0.1uF  [0402]  144.37,154.35 270 top
C444  10uF  [EIA3216]  148.8,153.15 0 top
C445  1.0uF  [0402]  164.96,135.54 270 top
C446  1.0uF  [0402]  166.62,137.45 0 top
C447  1.0uF  [0402]  167.67,140.78 90 top
C448  1.0uF  [0402]  166.47,143 0 top
C449  0.1uF  [0402]  167.1,138.87 0 top
C450  0.1uF  [0402]  166.31,140.78 90 top
C451  0.1uF  [0402]  165.35,130.7 270 top
C452  1.0uF  [0402]  166,149.35 90 top
C453  1.0uF  [0402]  168.98,147.15 180 top
C454  10uF  [EIA3216]  169.64,145.07 0 top
C455  0.1uF  [0402]  165.2,154.35 270 top
C456  10uF  [EIA3216]  169.62,153.15 0 top
C457  1.0uF  [0402]  185.79,135.54 270 top
C458  1.0uF  [0402]  187.45,137.45 0 top
C459  1.0uF  [0402]  188.5,140.78 90 top
C460  1.0uF  [0402]  187.29,143 0 top
C461  0.1uF  [0402]  187.93,138.87 0 top
C462  0.1uF  [0402]  187.13,140.78 90 top
C463  0.1uF  [0402]  186.18,130.7 270 top
C464  1.0uF  [0402]  186.82,149.35 90 top
C465  1.0uF  [0402]  189.81,147.15 180 top
C466  10uF  [EIA3216]  190.47,145.07 0 top
C467  0.1uF  [0402]  186.02,154.35 270 top
C468  10uF  [EIA3216]  190.45,153.15 0 top
C469  1.0uF  [0402]  206.61,135.54 270 top
C470  1.0uF  [0402]  208.28,137.45 0 top
C471  1.0uF  [0402]  209.33,140.78 90 top
C472  1.0uF  [0402]  208.12,143 0 top
C473  0.1uF  [0402]  208.76,138.87 0 top
C474  0.1uF  [0402]  207.96,140.78 90 top
C475  0.1uF  [0402]  207.01,130.7 270 top
C476  1.0uF  [0402]  207.65,149.35 90 top
C477  1.0uF  [0402]  210.64,147.15 180 top
C478  10uF  [EIA3216]  211.3,145.07 0 top
C479  0.1uF  [0402]  206.85,154.35 270 top
C480  10uF  [EIA3216]  211.28,153.15 0 top
D1  RED  [LED-0603]  8.6,35.27 90 top
D2  RED  [LED-0603]  29.43,35.27 90 top
D3  RED  [LED-0603]  50.26,35.27 90 top
D4  RED  [LED-0603]  71.09,35.27 90 top
D5  RED  [LED-0603]  91.92,35.27 90 top
D6  RED  [LED-0603]  112.74,35.27 90 top
D7  RED  [LED-0603]  133.57,35.27 90 top
D8  RED  [LED-0603]  154.4,35.27 90 top
D9  RED  [LED-0603]  175.23,35.27 90 top
D10  RED  [LED-0603]  196.06,35.27 90 top
D11  RED  [LED-0603]  8.6,73.88 90 top
D12  RED  [LED-0603]  29.43,73.88 90 top
D13  RED  [LED-0603]  50.26,73.88 90 top
D14  RED  [LED-0603]  71.09,73.88 90 top
D15  RED  [LED-0603]  91.92,73.88 90 top
D16  RED  [LED-0603]  112.74,73.88 90 top
D17  RED  [LED-0603]  133.57,73.88 90 top
D18  RED  [LED-0603]  154.4,73.88 90 top
D19  RED  [LED-0603]  175.23,73.88 90 top
D20  RED  [LED-0603]  196.06,73.88 90 top
D21  RED  [LED-0603]  8.6,112.49 90 top
D22  RED  [LED-0603]  29.43,112.49 90 top
D23  RED  [LED-0603]  50.26,112.49 90 top
D24  RED  [LED-0603]  71.09,112.49 90 top
D25  RED  [LED-0603]  91.92,112.49 90 top
D26  RED  [LED-0603]  112.74,112.49 90 top
D27  RED  [LED-0603]  133.57,112.49 90 top
D28  RED  [LED-0603]  154.4,112.49 90 top
D29  RED  [LED-0603]  175.23,112.49 90 top
D30  RED  [LED-0603]  196.06,112.49 90 top
D31  RED  [LED-0603]  8.6,151.1 90 top
D32  RED  [LED-0603]  29.43,151.1 90 top
D33  RED  [LED-0603]  50.26,151.1 90 top
D34  RED  [LED-0603]  71.09,151.1 90 top
D35  RED  [LED-0603]  91.92,151.1 90 top
D36  RED  [LED-0603]  112.74,151.1 90 top
D37  RED  [LED-0603]  133.57,151.1 90 top
D38  RED  [LED-0603]  154.4,151.1 90 top
D39  RED  [LED-0603]  175.23,151.1 90 top
D40  RED  [LED-0603]  196.06,151.1 90 top
E$1  [FIDUCIAL-1.5X3]  4.57,9.4 0 top
E$5  [FIDUCIAL-1X2]  216.28,10.67 0 top
E$6  [FIDUCIAL-1X2]  216.28,157.73 180 top
FD1  FIDUCIALUFIDUCIAL  [MICRO-FIDUCIAL]  25.91,8.13 90 top
FD2  FIDUCIALUFIDUCIAL  [MICRO-FIDUCIAL]  7.81,40.04 90 top
FD3  FIDUCIALUFIDUCIAL  [MICRO-FIDUCIAL]  46.74,8.13 90 top
FD4  FIDUCIALUFIDUCIAL  [MICRO-FIDUCIAL]  28.64,40.04 90 top
FD5  FIDUCIALUFIDUCIAL  [MICRO-FIDUCIAL]  67.56,8.13 90 top
FD6  FIDUCIALUFIDUCIAL  [MICRO-FIDUCIAL]  49.47,40.04 90 top
FD7  FIDUCIALUFIDUCIAL  [MICRO-FIDUCIAL]  88.39,8.13 90 top
FD8  FIDUCIALUFIDUCIAL  [MICRO-FIDUCIAL]  70.29,40.04 90 top
FD9  FIDUCIALUFIDUCIAL  [MICRO-FIDUCIAL]  109.22,8.13 90 top
FD10  FIDUCIALUFIDUCIAL  [MICRO-FIDUCIAL]  91.12,40.04 90 top
FD11  FIDUCIALUFIDUCIAL  [MICRO-FIDUCIAL]  130.05,8.13 90 top
FD12  FIDUCIALUFIDUCIAL  [MICRO-FIDUCIAL]  111.95,40.04 90 top
FD13  FIDUCIALUFIDUCIAL  [MICRO-FIDUCIAL]  150.88,8.13 90 top
FD14  FIDUCIALUFIDUCIAL  [MICRO-FIDUCIAL]  132.78,40.04 90 top
FD15  FIDUCIALUFIDUCIAL  [MICRO-FIDUCIAL]  171.7,8.13 90 top
FD16  FIDUCIALUFIDUCIAL  [MICRO-FIDUCIAL]  153.61,40.04 90 top
FD17  FIDUCIALUFIDUCIAL  [MICRO-FIDUCIAL]  192.53,8.13 90 top
FD18  FIDUCIALUFIDUCIAL  [MICRO-FIDUCIAL]  174.43,40.04 90 top
FD19  FIDUCIALUFIDUCIAL  [MICRO-FIDUCIAL]  213.36,8.13 90 top
FD20  FIDUCIALUFIDUCIAL  [MICRO-FIDUCIAL]  195.26,40.04 90 top
FD21  FIDUCIALUFIDUCIAL  [MICRO-FIDUCIAL]  25.91,46.74 90 top
FD22  FIDUCIALUFIDUCIAL  [MICRO-FIDUCIAL]  7.81,78.64 90 top
FD23  FIDUCIALUFIDUCIAL  [MICRO-FIDUCIAL]  46.74,46.74 90 top
FD24  FIDUCIALUFIDUCIAL  [MICRO-FIDUCIAL]  28.64,78.64 90 top
FD25  FIDUCIALUFIDUCIAL  [MICRO-FIDUCIAL]  67.56,46.74 90 top
FD26  FIDUCIALUFIDUCIAL  [MICRO-FIDUCIAL]  49.47,78.64 90 top
FD27  FIDUCIALUFIDUCIAL  [MICRO-FIDUCIAL]  88.39,46.74 90 top
FD28  FIDUCIALUFIDUCIAL  [MICRO-FIDUCIAL]  70.29,78.64 90 top
FD29  FIDUCIALUFIDUCIAL  [MICRO-FIDUCIAL]  109.22,46.74 90 top
FD30  FIDUCIALUFIDUCIAL  [MICRO-FIDUCIAL]  91.12,78.64 90 top
FD31  FIDUCIALUFIDUCIAL  [MICRO-FIDUCIAL]  130.05,46.74 90 top
FD32  FIDUCIALUFIDUCIAL  [MICRO-FIDUCIAL]  111.95,78.64 90 top
FD33  FIDUCIALUFIDUCIAL  [MICRO-FIDUCIAL]  150.88,46.74 90 top
FD34  FIDUCIALUFIDUCIAL  [MICRO-FIDUCIAL]  132.78,78.64 90 top
FD35  FIDUCIALUFIDUCIAL  [MICRO-FIDUCIAL]  171.7,46.74 90 top
FD36  FIDUCIALUFIDUCIAL  [MICRO-FIDUCIAL]  153.61,78.64 90 top
FD37  FIDUCIALUFIDUCIAL  [MICRO-FIDUCIAL]  192.53,46.74 90 top
FD38  FIDUCIALUFIDUCIAL  [MICRO-FIDUCIAL]  174.43,78.64 90 top
FD39  FIDUCIALUFIDUCIAL  [MICRO-FIDUCIAL]  213.36,46.74 90 top
FD40  FIDUCIALUFIDUCIAL  [MICRO-FIDUCIAL]  195.26,78.64 90 top
FD41  FIDUCIALUFIDUCIAL  [MICRO-FIDUCIAL]  25.91,85.34 90 top
FD42  FIDUCIALUFIDUCIAL  [MICRO-FIDUCIAL]  7.81,117.25 90 top
FD43  FIDUCIALUFIDUCIAL  [MICRO-FIDUCIAL]  46.74,85.34 90 top
FD44  FIDUCIALUFIDUCIAL  [MICRO-FIDUCIAL]  28.64,117.25 90 top
FD45  FIDUCIALUFIDUCIAL  [MICRO-FIDUCIAL]  67.56,85.34 90 top
FD46  FIDUCIALUFIDUCIAL  [MICRO-FIDUCIAL]  49.47,117.25 90 top
FD47  FIDUCIALUFIDUCIAL  [MICRO-FIDUCIAL]  88.39,85.34 90 top
FD48  FIDUCIALUFIDUCIAL  [MICRO-FIDUCIAL]  70.29,117.25 90 top
FD49  FIDUCIALUFIDUCIAL  [MICRO-FIDUCIAL]  109.22,85.34 90 top
FD50  FIDUCIALUFIDUCIAL  [MICRO-FIDUCIAL]  91.12,117.25 90 top
FD51  FIDUCIALUFIDUCIAL  [MICRO-FIDUCIAL]  130.05,85.34 90 top
FD52  FIDUCIALUFIDUCIAL  [MICRO-FIDUCIAL]  111.95,117.25 90 top
FD53  FIDUCIALUFIDUCIAL  [MICRO-FIDUCIAL]  150.88,85.34 90 top
FD54  FIDUCIALUFIDUCIAL  [MICRO-FIDUCIAL]  132.78,117.25 90 top
FD55  FIDUCIALUFIDUCIAL  [MICRO-FIDUCIAL]  171.7,85.34 90 top
FD56  FIDUCIALUFIDUCIAL  [MICRO-FIDUCIAL]  153.61,117.25 90 top
FD57  FIDUCIALUFIDUCIAL  [MICRO-FIDUCIAL]  192.53,85.34 90 top
FD58  FIDUCIALUFIDUCIAL  [MICRO-FIDUCIAL]  174.43,117.25 90 top
FD59  FIDUCIALUFIDUCIAL  [MICRO-FIDUCIAL]  213.36,85.34 90 top
FD60  FIDUCIALUFIDUCIAL  [MICRO-FIDUCIAL]  195.26,117.25 90 top
FD61  FIDUCIALUFIDUCIAL  [MICRO-FIDUCIAL]  25.91,123.95 90 top
FD62  FIDUCIALUFIDUCIAL  [MICRO-FIDUCIAL]  7.81,155.86 90 top
FD63  FIDUCIALUFIDUCIAL  [MICRO-FIDUCIAL]  46.74,123.95 90 top
FD64  FIDUCIALUFIDUCIAL  [MICRO-FIDUCIAL]  28.64,155.86 90 top
FD65  FIDUCIALUFIDUCIAL  [MICRO-FIDUCIAL]  67.56,123.95 90 top
FD66  FIDUCIALUFIDUCIAL  [MICRO-FIDUCIAL]  49.47,155.86 90 top
FD67  FIDUCIALUFIDUCIAL  [MICRO-FIDUCIAL]  88.39,123.95 90 top
FD68  FIDUCIALUFIDUCIAL  [MICRO-FIDUCIAL]  70.29,155.86 90 top
FD69  FIDUCIALUFIDUCIAL  [MICRO-FIDUCIAL]  109.22,123.95 90 top
FD70  FIDUCIALUFIDUCIAL  [MICRO-FIDUCIAL]  91.12,155.86 90 top
FD71  FIDUCIALUFIDUCIAL  [MICRO-FIDUCIAL]  130.05,123.95 90 top
FD72  FIDUCIALUFIDUCIAL  [MICRO-FIDUCIAL]  111.95,155.86 90 top
FD73  FIDUCIALUFIDUCIAL  [MICRO-FIDUCIAL]  150.88,123.95 90 top
FD74  FIDUCIALUFIDUCIAL  [MICRO-FIDUCIAL]  132.78,155.86 90 top
FD75  FIDUCIALUFIDUCIAL  [MICRO-FIDUCIAL]  171.7,123.95 90 top
FD76  FIDUCIALUFIDUCIAL  [MICRO-FIDUCIAL]  153.61,155.86 90 top
FD77  FIDUCIALUFIDUCIAL  [MICRO-FIDUCIAL]  192.53,123.95 90 top
FD78  FIDUCIALUFIDUCIAL  [MICRO-FIDUCIAL]  174.43,155.86 90 top
FD79  FIDUCIALUFIDUCIAL  [MICRO-FIDUCIAL]  213.36,123.95 90 top
FD80  FIDUCIALUFIDUCIAL  [MICRO-FIDUCIAL]  195.26,155.86 90 top
H1  STAND-OFF  [STAND-OFF]  13.21,33.53 0 top
H2  STAND-OFF  [STAND-OFF]  9.4,42.42 0 top
H3  STAND-OFF  [STAND-OFF]  24.64,42.42 0 top
H4  STAND-OFF  [STAND-OFF]  9.4,9.4 0 top
H5  STAND-OFF  [STAND-OFF]  34.04,33.53 0 top
H6  STAND-OFF  [STAND-OFF]  30.23,42.42 0 top
H7  STAND-OFF  [STAND-OFF]  45.47,42.42 0 top
H8  STAND-OFF  [STAND-OFF]  30.23,9.4 0 top
H9  STAND-OFF  [STAND-OFF]  54.86,33.53 0 top
H10  STAND-OFF  [STAND-OFF]  51.05,42.42 0 top
H11  STAND-OFF  [STAND-OFF]  66.29,42.42 0 top
H12  STAND-OFF  [STAND-OFF]  51.05,9.4 0 top
H13  STAND-OFF  [STAND-OFF]  75.69,33.53 0 top
H14  STAND-OFF  [STAND-OFF]  71.88,42.42 0 top
H15  STAND-OFF  [STAND-OFF]  87.12,42.42 0 top
H16  STAND-OFF  [STAND-OFF]  71.88,9.4 0 top
H17  STAND-OFF  [STAND-OFF]  96.52,33.53 0 top
H18  STAND-OFF  [STAND-OFF]  92.71,42.42 0 top
H19  STAND-OFF  [STAND-OFF]  107.95,42.42 0 top
H20  STAND-OFF  [STAND-OFF]  92.71,9.4 0 top
H21  STAND-OFF  [STAND-OFF]  117.35,33.53 0 top
H22  STAND-OFF  [STAND-OFF]  113.54,42.42 0 top
H23  STAND-OFF  [STAND-OFF]  128.78,42.42 0 top
H24  STAND-OFF  [STAND-OFF]  113.54,9.4 0 top
H25  STAND-OFF  [STAND-OFF]  138.18,33.53 0 top
H26  STAND-OFF  [STAND-OFF]  134.37,42.42 0 top
H27  STAND-OFF  [STAND-OFF]  149.61,42.42 0 top
H28  STAND-OFF  [STAND-OFF]  134.37,9.4 0 top
H29  STAND-OFF  [STAND-OFF]  159,33.53 0 top
H30  STAND-OFF  [STAND-OFF]  155.19,42.42 0 top
H31  STAND-OFF  [STAND-OFF]  170.43,42.42 0 top
H32  STAND-OFF  [STAND-OFF]  155.19,9.4 0 top
H33  STAND-OFF  [STAND-OFF]  179.83,33.53 0 top
H34  STAND-OFF  [STAND-OFF]  176.02,42.42 0 top
H35  STAND-OFF  [STAND-OFF]  191.26,42.42 0 top
H36  STAND-OFF  [STAND-OFF]  176.02,9.4 0 top
H37  STAND-OFF  [STAND-OFF]  200.66,33.53 0 top
H38  STAND-OFF  [STAND-OFF]  196.85,42.42 0 top
H39  STAND-OFF  [STAND-OFF]  212.09,42.42 0 top
H40  STAND-OFF  [STAND-OFF]  196.85,9.4 0 top
H41  STAND-OFF  [STAND-OFF]  13.21,72.14 0 top
H42  STAND-OFF  [STAND-OFF]  9.4,81.03 0 top
H43  STAND-OFF  [STAND-OFF]  24.64,81.03 0 top
H44  STAND-OFF  [STAND-OFF]  9.4,48.01 0 top
H45  STAND-OFF  [STAND-OFF]  34.04,72.14 0 top
H46  STAND-OFF  [STAND-OFF]  30.23,81.03 0 top
H47  STAND-OFF  [STAND-OFF]  45.47,81.03 0 top
H48  STAND-OFF  [STAND-OFF]  30.23,48.01 0 top
H49  STAND-OFF  [STAND-OFF]  54.86,72.14 0 top
H50  STAND-OFF  [STAND-OFF]  51.05,81.03 0 top
H51  STAND-OFF  [STAND-OFF]  66.29,81.03 0 top
H52  STAND-OFF  [STAND-OFF]  51.05,48.01 0 top
H53  STAND-OFF  [STAND-OFF]  75.69,72.14 0 top
H54  STAND-OFF  [STAND-OFF]  71.88,81.03 0 top
H55  STAND-OFF  [STAND-OFF]  87.12,81.03 0 top
H56  STAND-OFF  [STAND-OFF]  71.88,48.01 0 top
H57  STAND-OFF  [STAND-OFF]  96.52,72.14 0 top
H58  STAND-OFF  [STAND-OFF]  92.71,81.03 0 top
H59  STAND-OFF  [STAND-OFF]  107.95,81.03 0 top
H60  STAND-OFF  [STAND-OFF]  92.71,48.01 0 top
H61  STAND-OFF  [STAND-OFF]  117.35,72.14 0 top
H62  STAND-OFF  [STAND-OFF]  113.54,81.03 0 top
H63  STAND-OFF  [STAND-OFF]  128.78,81.03 0 top
H64  STAND-OFF  [STAND-OFF]  113.54,48.01 0 top
H65  STAND-OFF  [STAND-OFF]  138.18,72.14 0 top
H66  STAND-OFF  [STAND-OFF]  134.37,81.03 0 top
H67  STAND-OFF  [STAND-OFF]  149.61,81.03 0 top
H68  STAND-OFF  [STAND-OFF]  134.37,48.01 0 top
H69  STAND-OFF  [STAND-OFF]  159,72.14 0 top
H70  STAND-OFF  [STAND-OFF]  155.19,81.03 0 top
H71  STAND-OFF  [STAND-OFF]  170.43,81.03 0 top
H72  STAND-OFF  [STAND-OFF]  155.19,48.01 0 top
H73  STAND-OFF  [STAND-OFF]  179.83,72.14 0 top
H74  STAND-OFF  [STAND-OFF]  176.02,81.03 0 top
H75  STAND-OFF  [STAND-OFF]  191.26,81.03 0 top
H76  STAND-OFF  [STAND-OFF]  176.02,48.01 0 top
H77  STAND-OFF  [STAND-OFF]  200.66,72.14 0 top
H78  STAND-OFF  [STAND-OFF]  196.85,81.03 0 top
H79  STAND-OFF  [STAND-OFF]  212.09,81.03 0 top
H80  STAND-OFF  [STAND-OFF]  196.85,48.01 0 top
H81  STAND-OFF  [STAND-OFF]  13.21,110.74 0 top
H82  STAND-OFF  [STAND-OFF]  9.4,119.63 0 top
H83  STAND-OFF  [STAND-OFF]  24.64,119.63 0 top
H84  STAND-OFF  [STAND-OFF]  9.4,86.61 0 top
H85  STAND-OFF  [STAND-OFF]  34.04,110.74 0 top
H86  STAND-OFF  [STAND-OFF]  30.23,119.63 0 top
H87  STAND-OFF  [STAND-OFF]  45.47,119.63 0 top
H88  STAND-OFF  [STAND-OFF]  30.23,86.61 0 top
H89  STAND-OFF  [STAND-OFF]  54.86,110.74 0 top
H90  STAND-OFF  [STAND-OFF]  51.05,119.63 0 top
H91  STAND-OFF  [STAND-OFF]  66.29,119.63 0 top
H92  STAND-OFF  [STAND-OFF]  51.05,86.61 0 top
H93  STAND-OFF  [STAND-OFF]  75.69,110.74 0 top
H94  STAND-OFF  [STAND-OFF]  71.88,119.63 0 top
H95  STAND-OFF  [STAND-OFF]  87.12,119.63 0 top
H96  STAND-OFF  [STAND-OFF]  71.88,86.61 0 top
H97  STAND-OFF  [STAND-OFF]  96.52,110.74 0 top
H98  STAND-OFF  [STAND-OFF]  92.71,119.63 0 top
H99  STAND-OFF  [STAND-OFF]  107.95,119.63 0 top
H100  STAND-OFF  [STAND-OFF]  92.71,86.61 0 top
H101  STAND-OFF  [STAND-OFF]  117.35,110.74 0 top
H102  STAND-OFF  [STAND-OFF]  113.54,119.63 0 top
H103  STAND-OFF  [STAND-OFF]  128.78,119.63 0 top
H104  STAND-OFF  [STAND-OFF]  113.54,86.61 0 top
H105  STAND-OFF  [STAND-OFF]  138.18,110.74 0 top
H106  STAND-OFF  [STAND-OFF]  134.37,119.63 0 top
H107  STAND-OFF  [STAND-OFF]  149.61,119.63 0 top
H108  STAND-OFF  [STAND-OFF]  134.37,86.61 0 top
H109  STAND-OFF  [STAND-OFF]  159,110.74 0 top
H110  STAND-OFF  [STAND-OFF]  155.19,119.63 0 top
H111  STAND-OFF  [STAND-OFF]  170.43,119.63 0 top
H112  STAND-OFF  [STAND-OFF]  155.19,86.61 0 top
H113  STAND-OFF  [STAND-OFF]  179.83,110.74 0 top
H114  STAND-OFF  [STAND-OFF]  176.02,119.63 0 top
H115  STAND-OFF  [STAND-OFF]  191.26,119.63 0 top
H116  STAND-OFF  [STAND-OFF]  176.02,86.61 0 top
H117  STAND-OFF  [STAND-OFF]  200.66,110.74 0 top
H118  STAND-OFF  [STAND-OFF]  196.85,119.63 0 top
H119  STAND-OFF  [STAND-OFF]  212.09,119.63 0 top
H120  STAND-OFF  [STAND-OFF]  196.85,86.61 0 top
H121  STAND-OFF  [STAND-OFF]  13.21,149.35 0 top
H122  STAND-OFF  [STAND-OFF]  9.4,158.24 0 top
H123  STAND-OFF  [STAND-OFF]  24.64,158.24 0 top
H124  STAND-OFF  [STAND-OFF]  9.4,125.22 0 top
H125  STAND-OFF  [STAND-OFF]  34.04,149.35 0 top
H126  STAND-OFF  [STAND-OFF]  30.23,158.24 0 top
H127  STAND-OFF  [STAND-OFF]  45.47,158.24 0 top
H128  STAND-OFF  [STAND-OFF]  30.23,125.22 0 top
H129  STAND-OFF  [STAND-OFF]  54.86,149.35 0 top
H130  STAND-OFF  [STAND-OFF]  51.05,158.24 0 top
H131  STAND-OFF  [STAND-OFF]  66.29,158.24 0 top
H132  STAND-OFF  [STAND-OFF]  51.05,125.22 0 top
H133  STAND-OFF  [STAND-OFF]  75.69,149.35 0 top
H134  STAND-OFF  [STAND-OFF]  71.88,158.24 0 top
H135  STAND-OFF  [STAND-OFF]  87.12,158.24 0 top
H136  STAND-OFF  [STAND-OFF]  71.88,125.22 0 top
H137  STAND-OFF  [STAND-OFF]  96.52,149.35 0 top
H138  STAND-OFF  [STAND-OFF]  92.71,158.24 0 top
H139  STAND-OFF  [STAND-OFF]  107.95,158.24 0 top
H140  STAND-OFF  [STAND-OFF]  92.71,125.22 0 top
H141  STAND-OFF  [STAND-OFF]  117.35,149.35 0 top
H142  STAND-OFF  [STAND-OFF]  113.54,158.24 0 top
H143  STAND-OFF  [STAND-OFF]  128.78,158.24 0 top
H144  STAND-OFF  [STAND-OFF]  113.54,125.22 0 top
H145  STAND-OFF  [STAND-OFF]  138.18,149.35 0 top
H146  STAND-OFF  [STAND-OFF]  134.37,158.24 0 top
H147  STAND-OFF  [STAND-OFF]  149.61,158.24 0 top
H148  STAND-OFF  [STAND-OFF]  134.37,125.22 0 top
H149  STAND-OFF  [STAND-OFF]  159,149.35 0 top
H150  STAND-OFF  [STAND-OFF]  155.19,158.24 0 top
H151  STAND-OFF  [STAND-OFF]  170.43,158.24 0 top
H152  STAND-OFF  [STAND-OFF]  155.19,125.22 0 top
H153  STAND-OFF  [STAND-OFF]  179.83,149.35 0 top
H154  STAND-OFF  [STAND-OFF]  176.02,158.24 0 top
H155  STAND-OFF  [STAND-OFF]  191.26,158.24 0 top
H156  STAND-OFF  [STAND-OFF]  176.02,125.22 0 top
H157  STAND-OFF  [STAND-OFF]  200.66,149.35 0 top
H158  STAND-OFF  [STAND-OFF]  196.85,158.24 0 top
H159  STAND-OFF  [STAND-OFF]  212.09,158.24 0 top
H160  STAND-OFF  [STAND-OFF]  196.85,125.22 0 top
J1  DNP  [1X02_NO_SILK]  20.83,43.69 180 top
J2  DNP  [1X05]  13.21,8.13 0 top
J3  DNP  [1X02_NO_SILK]  15.75,43.69 180 top
J4  DNP  [1X05]  8.13,13.21 90 top
J5  DNP  [1X02@1]  25.91,23.37 270 top
J6  DNP  [1X02@1]  25.91,18.29 270 top
J7  DNP  [1X01]  25.91,10.67 0 top
J8  CORTEX_DEBUGPTH  [2X5-PTH-1.27MM]  22.1,13.84 90 top
J9  DNP  [1X05]  34.04,8.13 0 top
J10  DNP  [1X05]  28.96,13.21 90 top
J11  DNP  [1X02@1]  46.74,23.37 270 top
J12  DNP  [1X02@1]  46.74,18.29 270 top
J13  CORTEX_DEBUGPTH  [2X5-PTH-1.27MM]  42.93,13.84 90 top
J14  DNP  [1X02_NO_SILK]  41.66,43.69 180 top
J15  DNP  [1X02_NO_SILK]  36.58,43.69 180 top
J16  DNP  [1X01]  46.74,10.67 0 top
J17  DNP  [1X05]  54.86,8.13 0 top
J18  DNP  [1X05]  49.78,13.21 90 top
J19  DNP  [1X02@1]  67.56,23.37 270 top
J20  DNP  [1X02@1]  67.56,18.29 270 top
J21  CORTEX_DEBUGPTH  [2X5-PTH-1.27MM]  63.75,13.84 90 top
J22  DNP  [1X02_NO_SILK]  62.48,43.69 180 top
J23  DNP  [1X02_NO_SILK]  57.4,43.69 180 top
J24  DNP  [1X01]  67.56,10.67 0 top
J25  DNP  [1X05]  75.69,8.13 0 top
J26  DNP  [1X05]  70.61,13.21 90 top
J27  DNP  [1X02@1]  88.39,23.37 270 top
J28  DNP  [1X02@1]  88.39,18.29 270 top
J29  CORTEX_DEBUGPTH  [2X5-PTH-1.27MM]  84.58,13.84 90 top
J30  DNP  [1X02_NO_SILK]  83.31,43.69 180 top
J31  DNP  [1X02_NO_SILK]  78.23,43.69 180 top
J32  DNP  [1X01]  88.39,10.67 0 top
J33  DNP  [1X05]  96.52,8.13 0 top
J34  DNP  [1X05]  91.44,13.21 90 top
J35  DNP  [1X02@1]  109.22,23.37 270 top
J36  DNP  [1X02@1]  109.22,18.29 270 top
J37  CORTEX_DEBUGPTH  [2X5-PTH-1.27MM]  105.41,13.84 90 top
J38  DNP  [1X02_NO_SILK]  104.14,43.69 180 top
J39  DNP  [1X02_NO_SILK]  99.06,43.69 180 top
J40  DNP  [1X01]  109.22,10.67 0 top
J41  DNP  [1X05]  117.35,8.13 0 top
J42  DNP  [1X05]  112.27,13.21 90 top
J43  DNP  [1X02@1]  130.05,23.37 270 top
J44  DNP  [1X02@1]  130.05,18.29 270 top
J45  CORTEX_DEBUGPTH  [2X5-PTH-1.27MM]  126.24,13.84 90 top
J46  DNP  [1X02_NO_SILK]  124.97,43.69 180 top
J47  DNP  [1X02_NO_SILK]  119.89,43.69 180 top
J48  DNP  [1X01]  130.05,10.67 0 top
J49  DNP  [1X05]  138.18,8.13 0 top
J50  DNP  [1X05]  133.1,13.21 90 top
J51  DNP  [1X02@1]  150.88,23.37 270 top
J52  DNP  [1X02@1]  150.88,18.29 270 top
J53  CORTEX_DEBUGPTH  [2X5-PTH-1.27MM]  147.07,13.84 90 top
J54  DNP  [1X02_NO_SILK]  145.8,43.69 180 top
J55  DNP  [1X02_NO_SILK]  140.72,43.69 180 top
J56  DNP  [1X01]  150.88,10.67 0 top
J57  DNP  [1X05]  159,8.13 0 top
J58  DNP  [1X05]  153.92,13.21 90 top
J59  DNP  [1X02@1]  171.7,23.37 270 top
J60  DNP  [1X02@1]  171.7,18.29 270 top
J61  CORTEX_DEBUGPTH  [2X5-PTH-1.27MM]  167.89,13.84 90 top
J62  DNP  [1X02_NO_SILK]  166.62,43.69 180 top
J63  DNP  [1X02_NO_SILK]  161.54,43.69 180 top
J64  DNP  [1X01]  171.7,10.67 0 top
J65  DNP  [1X05]  179.83,8.13 0 top
J66  DNP  [1X05]  174.75,13.21 90 top
J67  DNP  [1X02@1]  192.53,23.37 270 top
J68  DNP  [1X02@1]  192.53,18.29 270 top
J69  CORTEX_DEBUGPTH  [2X5-PTH-1.27MM]  188.72,13.84 90 top
J70  DNP  [1X02_NO_SILK]  187.45,43.69 180 top
J71  DNP  [1X02_NO_SILK]  182.37,43.69 180 top
J72  DNP  [1X01]  192.53,10.67 0 top
J73  DNP  [1X05]  200.66,8.13 0 top
J74  DNP  [1X05]  195.58,13.21 90 top
J75  DNP  [1X02@1]  213.36,23.37 270 top
J76  DNP  [1X02@1]  213.36,18.29 270 top
J77  CORTEX_DEBUGPTH  [2X5-PTH-1.27MM]  209.55,13.84 90 top
J78  DNP  [1X02_NO_SILK]  208.28,43.69 180 top
J79  DNP  [1X02_NO_SILK]  203.2,43.69 180 top
J80  DNP  [1X01]  213.36,10.67 0 top
J81  DNP  [1X05]  13.21,46.74 0 top
J82  DNP  [1X05]  8.13,51.82 90 top
J83  DNP  [1X02@1]  25.91,61.98 270 top
J84  DNP  [1X02@1]  25.91,56.9 270 top
J85  CORTEX_DEBUGPTH  [2X5-PTH-1.27MM]  22.1,52.45 90 top
J86  DNP  [1X02_NO_SILK]  20.83,82.3 180 top
J87  DNP  [1X02_NO_SILK]  15.75,82.3 180 top
J88  DNP  [1X01]  25.91,49.28 0 top
J89  DNP  [1X05]  34.04,46.74 0 top
J90  DNP  [1X05]  28.96,51.82 90 top
J91  DNP  [1X02@1]  46.74,61.98 270 top
J92  DNP  [1X02@1]  46.74,56.9 270 top
J93  CORTEX_DEBUGPTH  [2X5-PTH-1.27MM]  42.93,52.45 90 top
J94  DNP  [1X02_NO_SILK]  41.66,82.3 180 top
J95  DNP  [1X02_NO_SILK]  36.58,82.3 180 top
J96  DNP  [1X01]  46.74,49.28 0 top
J97  DNP  [1X05]  54.86,46.74 0 top
J98  DNP  [1X05]  49.78,51.82 90 top
J99  DNP  [1X02@1]  67.56,61.98 270 top
J100  DNP  [1X02@1]  67.56,56.9 270 top
J101  CORTEX_DEBUGPTH  [2X5-PTH-1.27MM]  63.75,52.45 90 top
J102  DNP  [1X02_NO_SILK]  62.48,82.3 180 top
J103  DNP  [1X02_NO_SILK]  57.4,82.3 180 top
J104  DNP  [1X01]  67.56,49.28 0 top
J105  DNP  [1X05]  75.69,46.74 0 top
J106  DNP  [1X05]  70.61,51.82 90 top
J107  DNP  [1X02@1]  88.39,61.98 270 top
J108  DNP  [1X02@1]  88.39,56.9 270 top
J109  CORTEX_DEBUGPTH  [2X5-PTH-1.27MM]  84.58,52.45 90 top
J110  DNP  [1X02_NO_SILK]  83.31,82.3 180 top
J111  DNP  [1X02_NO_SILK]  78.23,82.3 180 top
J112  DNP  [1X01]  88.39,49.28 0 top
J113  DNP  [1X05]  96.52,46.74 0 top
J114  DNP  [1X05]  91.44,51.82 90 top
J115  DNP  [1X02@1]  109.22,61.98 270 top
J116  DNP  [1X02@1]  109.22,56.9 270 top
J117  CORTEX_DEBUGPTH  [2X5-PTH-1.27MM]  105.41,52.45 90 top
J118  DNP  [1X02_NO_SILK]  104.14,82.3 180 top
J119  DNP  [1X02_NO_SILK]  99.06,82.3 180 top
J120  DNP  [1X01]  109.22,49.28 0 top
J121  DNP  [1X05]  117.35,46.74 0 top
J122  DNP  [1X05]  112.27,51.82 90 top
J123  DNP  [1X02@1]  130.05,61.98 270 top
J124  DNP  [1X02@1]  130.05,56.9 270 top
J125  CORTEX_DEBUGPTH  [2X5-PTH-1.27MM]  126.24,52.45 90 top
J126  DNP  [1X02_NO_SILK]  124.97,82.3 180 top
J127  DNP  [1X02_NO_SILK]  119.89,82.3 180 top
J128  DNP  [1X01]  130.05,49.28 0 top
J129  DNP  [1X05]  138.18,46.74 0 top
J130  DNP  [1X05]  133.1,51.82 90 top
J131  DNP  [1X02@1]  150.88,61.98 270 top
J132  DNP  [1X02@1]  150.88,56.9 270 top
J133  CORTEX_DEBUGPTH  [2X5-PTH-1.27MM]  147.07,52.45 90 top
J134  DNP  [1X02_NO_SILK]  145.8,82.3 180 top
J135  DNP  [1X02_NO_SILK]  140.72,82.3 180 top
J136  DNP  [1X01]  150.88,49.28 0 top
J137  DNP  [1X05]  159,46.74 0 top
J138  DNP  [1X05]  153.92,51.82 90 top
J139  DNP  [1X02@1]  171.7,61.98 270 top
J140  DNP  [1X02@1]  171.7,56.9 270 top
J141  CORTEX_DEBUGPTH  [2X5-PTH-1.27MM]  167.89,52.45 90 top
J142  DNP  [1X02_NO_SILK]  166.62,82.3 180 top
J143  DNP  [1X02_NO_SILK]  161.54,82.3 180 top
J144  DNP  [1X01]  171.7,49.28 0 top
J145  DNP  [1X05]  179.83,46.74 0 top
J146  DNP  [1X05]  174.75,51.82 90 top
J147  DNP  [1X02@1]  192.53,61.98 270 top
J148  DNP  [1X02@1]  192.53,56.9 270 top
J149  CORTEX_DEBUGPTH  [2X5-PTH-1.27MM]  188.72,52.45 90 top
J150  DNP  [1X02_NO_SILK]  187.45,82.3 180 top
J151  DNP  [1X02_NO_SILK]  182.37,82.3 180 top
J152  DNP  [1X01]  192.53,49.28 0 top
J153  DNP  [1X05]  200.66,46.74 0 top
J154  DNP  [1X05]  195.58,51.82 90 top
J155  DNP  [1X02@1]  213.36,61.98 270 top
J156  DNP  [1X02@1]  213.36,56.9 270 top
J157  CORTEX_DEBUGPTH  [2X5-PTH-1.27MM]  209.55,52.45 90 top
J158  DNP  [1X02_NO_SILK]  208.28,82.3 180 top
J159  DNP  [1X02_NO_SILK]  203.2,82.3 180 top
J160  DNP  [1X01]  213.36,49.28 0 top
J161  DNP  [1X05]  13.21,85.34 0 top
J162  DNP  [1X05]  8.13,90.42 90 top
J163  DNP  [1X02@1]  25.91,100.58 270 top
J164  DNP  [1X02@1]  25.91,95.5 270 top
J165  CORTEX_DEBUGPTH  [2X5-PTH-1.27MM]  22.1,91.06 90 top
J166  DNP  [1X02_NO_SILK]  20.83,120.9 180 top
J167  DNP  [1X02_NO_SILK]  15.75,120.9 180 top
J168  DNP  [1X01]  25.91,87.88 0 top
J169  DNP  [1X05]  34.04,85.34 0 top
J170  DNP  [1X05]  28.96,90.42 90 top
J171  DNP  [1X02@1]  46.74,100.58 270 top
J172  DNP  [1X02@1]  46.74,95.5 270 top
J173  CORTEX_DEBUGPTH  [2X5-PTH-1.27MM]  42.93,91.06 90 top
J174  DNP  [1X02_NO_SILK]  41.66,120.9 180 top
J175  DNP  [1X02_NO_SILK]  36.58,120.9 180 top
J176  DNP  [1X01]  46.74,87.88 0 top
J177  DNP  [1X05]  54.86,85.34 0 top
J178  DNP  [1X05]  49.78,90.42 90 top
J179  DNP  [1X02@1]  67.56,100.58 270 top
J180  DNP  [1X02@1]  67.56,95.5 270 top
J181  CORTEX_DEBUGPTH  [2X5-PTH-1.27MM]  63.75,91.06 90 top
J182  DNP  [1X02_NO_SILK]  62.48,120.9 180 top
J183  DNP  [1X02_NO_SILK]  57.4,120.9 180 top
J184  DNP  [1X01]  67.56,87.88 0 top
J185  DNP  [1X05]  75.69,85.34 0 top
J186  DNP  [1X05]  70.61,90.42 90 top
J187  DNP  [1X02@1]  88.39,100.58 270 top
J188  DNP  [1X02@1]  88.39,95.5 270 top
J189  CORTEX_DEBUGPTH  [2X5-PTH-1.27MM]  84.58,91.06 90 top
J190  DNP  [1X02_NO_SILK]  83.31,120.9 180 top
J191  DNP  [1X02_NO_SILK]  78.23,120.9 180 top
J192  DNP  [1X01]  88.39,87.88 0 top
J193  DNP  [1X05]  96.52,85.34 0 top
J194  DNP  [1X05]  91.44,90.42 90 top
J195  DNP  [1X02@1]  109.22,100.58 270 top
J196  DNP  [1X02@1]  109.22,95.5 270 top
J197  CORTEX_DEBUGPTH  [2X5-PTH-1.27MM]  105.41,91.06 90 top
J198  DNP  [1X02_NO_SILK]  104.14,120.9 180 top
J199  DNP  [1X02_NO_SILK]  99.06,120.9 180 top
J200  DNP  [1X01]  109.22,87.88 0 top
J201  DNP  [1X05]  117.35,85.34 0 top
J202  DNP  [1X05]  112.27,90.42 90 top
J203  DNP  [1X02@1]  130.05,100.58 270 top
J204  DNP  [1X02@1]  130.05,95.5 270 top
J205  CORTEX_DEBUGPTH  [2X5-PTH-1.27MM]  126.24,91.06 90 top
J206  DNP  [1X02_NO_SILK]  124.97,120.9 180 top
J207  DNP  [1X02_NO_SILK]  119.89,120.9 180 top
J208  DNP  [1X01]  130.05,87.88 0 top
J209  DNP  [1X05]  138.18,85.34 0 top
J210  DNP  [1X05]  133.1,90.42 90 top
J211  DNP  [1X02@1]  150.88,100.58 270 top
J212  DNP  [1X02@1]  150.88,95.5 270 top
J213  CORTEX_DEBUGPTH  [2X5-PTH-1.27MM]  147.07,91.06 90 top
J214  DNP  [1X02_NO_SILK]  145.8,120.9 180 top
J215  DNP  [1X02_NO_SILK]  140.72,120.9 180 top
J216  DNP  [1X01]  150.88,87.88 0 top
J217  DNP  [1X05]  159,85.34 0 top
J218  DNP  [1X05]  153.92,90.42 90 top
J219  DNP  [1X02@1]  171.7,100.58 270 top
J220  DNP  [1X02@1]  171.7,95.5 270 top
J221  CORTEX_DEBUGPTH  [2X5-PTH-1.27MM]  167.89,91.06 90 top
J222  DNP  [1X02_NO_SILK]  166.62,120.9 180 top
J223  DNP  [1X02_NO_SILK]  161.54,120.9 180 top
J224  DNP  [1X01]  171.7,87.88 0 top
J225  DNP  [1X05]  179.83,85.34 0 top
J226  DNP  [1X05]  174.75,90.42 90 top
J227  DNP  [1X02@1]  192.53,100.58 270 top
J228  DNP  [1X02@1]  192.53,95.5 270 top
J229  CORTEX_DEBUGPTH  [2X5-PTH-1.27MM]  188.72,91.06 90 top
J230  DNP  [1X02_NO_SILK]  187.45,120.9 180 top
J231  DNP  [1X02_NO_SILK]  182.37,120.9 180 top
J232  DNP  [1X01]  192.53,87.88 0 top
J233  DNP  [1X05]  200.66,85.34 0 top
J234  DNP  [1X05]  195.58,90.42 90 top
J235  DNP  [1X02@1]  213.36,100.58 270 top
J236  DNP  [1X02@1]  213.36,95.5 270 top
J237  CORTEX_DEBUGPTH  [2X5-PTH-1.27MM]  209.55,91.06 90 top
J238  DNP  [1X02_NO_SILK]  208.28,120.9 180 top
J239  DNP  [1X02_NO_SILK]  203.2,120.9 180 top
J240  DNP  [1X01]  213.36,87.88 0 top
J241  DNP  [1X05]  13.21,123.95 0 top
J242  DNP  [1X05]  8.13,129.03 90 top
J243  DNP  [1X02@1]  25.91,139.19 270 top
J244  DNP  [1X02@1]  25.91,134.11 270 top
J245  CORTEX_DEBUGPTH  [2X5-PTH-1.27MM]  22.1,129.67 90 top
J246  DNP  [1X02_NO_SILK]  20.83,159.51 180 top
J247  DNP  [1X02_NO_SILK]  15.75,159.51 180 top
J248  DNP  [1X01]  25.91,126.49 0 top
J249  DNP  [1X05]  34.04,123.95 0 top
J250  DNP  [1X05]  28.96,129.03 90 top
J251  DNP  [1X02@1]  46.74,139.19 270 top
J252  DNP  [1X02@1]  46.74,134.11 270 top
J253  CORTEX_DEBUGPTH  [2X5-PTH-1.27MM]  42.93,129.67 90 top
J254  DNP  [1X02_NO_SILK]  41.66,159.51 180 top
J255  DNP  [1X02_NO_SILK]  36.58,159.51 180 top
J256  DNP  [1X01]  46.74,126.49 0 top
J257  DNP  [1X05]  54.86,123.95 0 top
J258  DNP  [1X05]  49.78,129.03 90 top
J259  DNP  [1X02@1]  67.56,139.19 270 top
J260  DNP  [1X02@1]  67.56,134.11 270 top
J261  CORTEX_DEBUGPTH  [2X5-PTH-1.27MM]  63.75,129.67 90 top
J262  DNP  [1X02_NO_SILK]  62.48,159.51 180 top
J263  DNP  [1X02_NO_SILK]  57.4,159.51 180 top
J264  DNP  [1X01]  67.56,126.49 0 top
J265  DNP  [1X05]  75.69,123.95 0 top
J266  DNP  [1X05]  70.61,129.03 90 top
J267  DNP  [1X02@1]  88.39,139.19 270 top
J268  DNP  [1X02@1]  88.39,134.11 270 top
J269  CORTEX_DEBUGPTH  [2X5-PTH-1.27MM]  84.58,129.67 90 top
J270  DNP  [1X02_NO_SILK]  83.31,159.51 180 top
J271  DNP  [1X02_NO_SILK]  78.23,159.51 180 top
J272  DNP  [1X01]  88.39,126.49 0 top
J273  DNP  [1X05]  96.52,123.95 0 top
J274  DNP  [1X05]  91.44,129.03 90 top
J275  DNP  [1X02@1]  109.22,139.19 270 top
J276  DNP  [1X02@1]  109.22,134.11 270 top
J277  CORTEX_DEBUGPTH  [2X5-PTH-1.27MM]  105.41,129.67 90 top
J278  DNP  [1X02_NO_SILK]  104.14,159.51 180 top
J279  DNP  [1X02_NO_SILK]  99.06,159.51 180 top
J280  DNP  [1X01]  109.22,126.49 0 top
J281  DNP  [1X05]  117.35,123.95 0 top
J282  DNP  [1X05]  112.27,129.03 90 top
J283  DNP  [1X02@1]  130.05,139.19 270 top
J284  DNP  [1X02@1]  130.05,134.11 270 top
J285  CORTEX_DEBUGPTH  [2X5-PTH-1.27MM]  126.24,129.67 90 top
J286  DNP  [1X02_NO_SILK]  124.97,159.51 180 top
J287  DNP  [1X02_NO_SILK]  119.89,159.51 180 top
J288  DNP  [1X01]  130.05,126.49 0 top
J289  DNP  [1X05]  138.18,123.95 0 top
J290  DNP  [1X05]  133.1,129.03 90 top
J291  DNP  [1X02@1]  150.88,139.19 270 top
J292  DNP  [1X02@1]  150.88,134.11 270 top
J293  CORTEX_DEBUGPTH  [2X5-PTH-1.27MM]  147.07,129.67 90 top
J294  DNP  [1X02_NO_SILK]  145.8,159.51 180 top
J295  DNP  [1X02_NO_SILK]  140.72,159.51 180 top
J296  DNP  [1X01]  150.88,126.49 0 top
J297  DNP  [1X05]  159,123.95 0 top
J298  DNP  [1X05]  153.92,129.03 90 top
J299  DNP  [1X02@1]  171.7,139.19 270 top
J300  DNP  [1X02@1]  171.7,134.11 270 top
J301  CORTEX_DEBUGPTH  [2X5-PTH-1.27MM]  167.89,129.67 90 top